# Altium PCB PreCharge.PcbDoc (part 1 of 2)
Units mil, origin at the board's own origin, x right, y up, seen from the top; angles counter-clockwise.
Board outline 4330.71 x 3149.61 mil, 2 copper layers (Component Side, Bottom Layer), stack 12.8 mil thick; 87 components, 44 nets, 242 pads, 58 vias.
Unrouted connection lines stored in the file: 38.
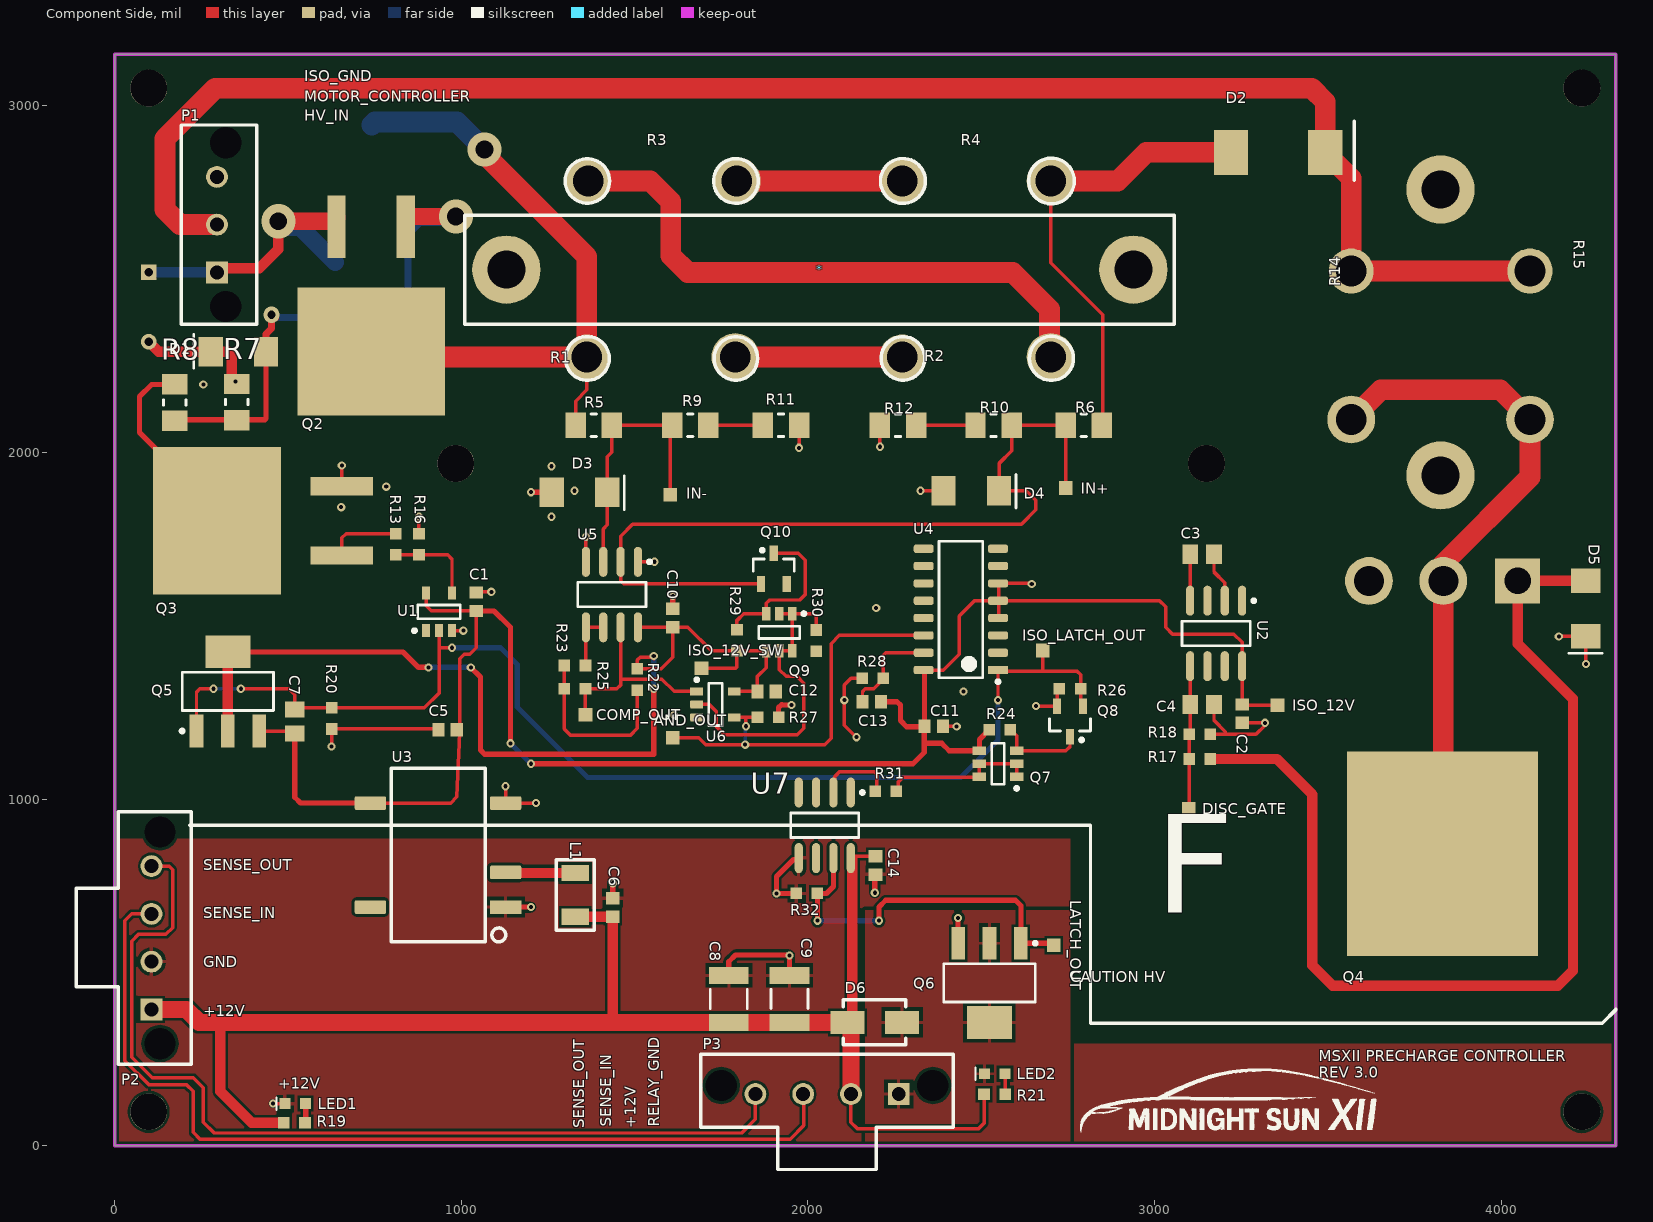
[diagram p0: Component Side view]
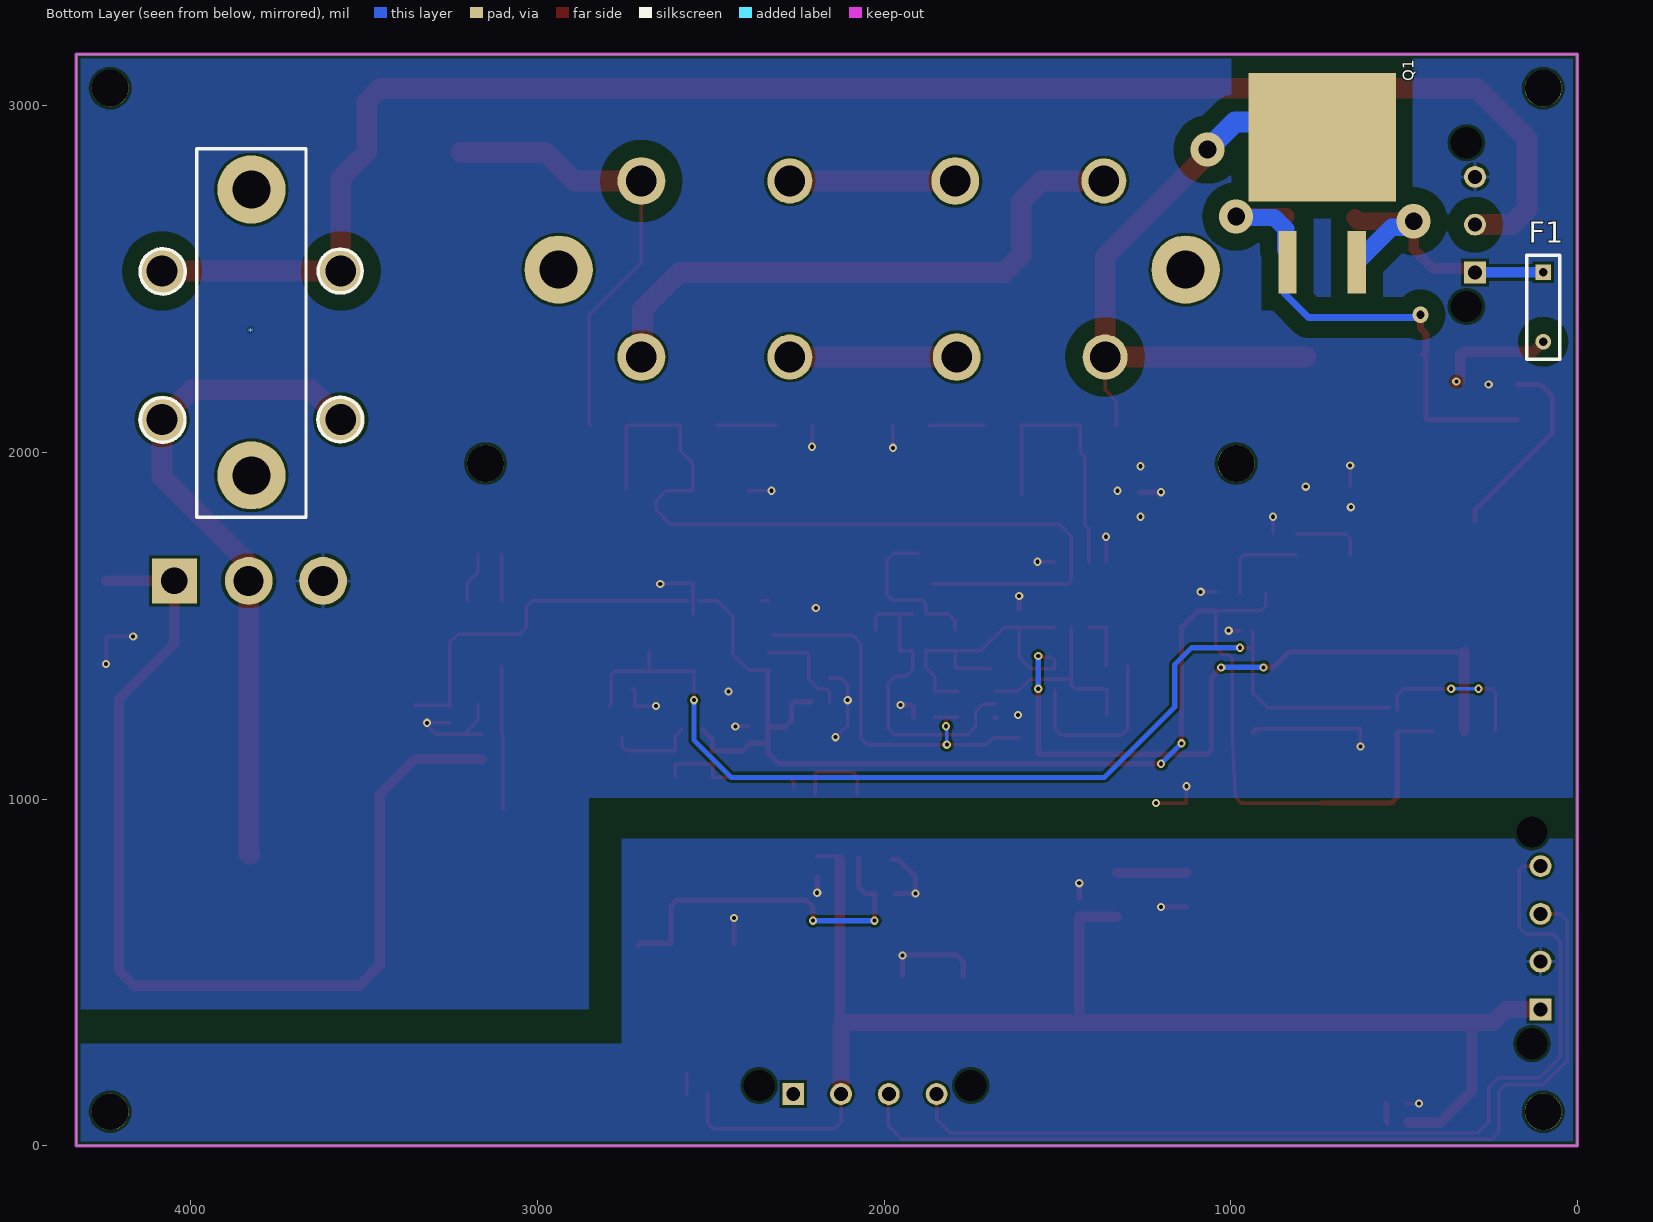
[diagram p1: Bottom Layer view, seen from below]
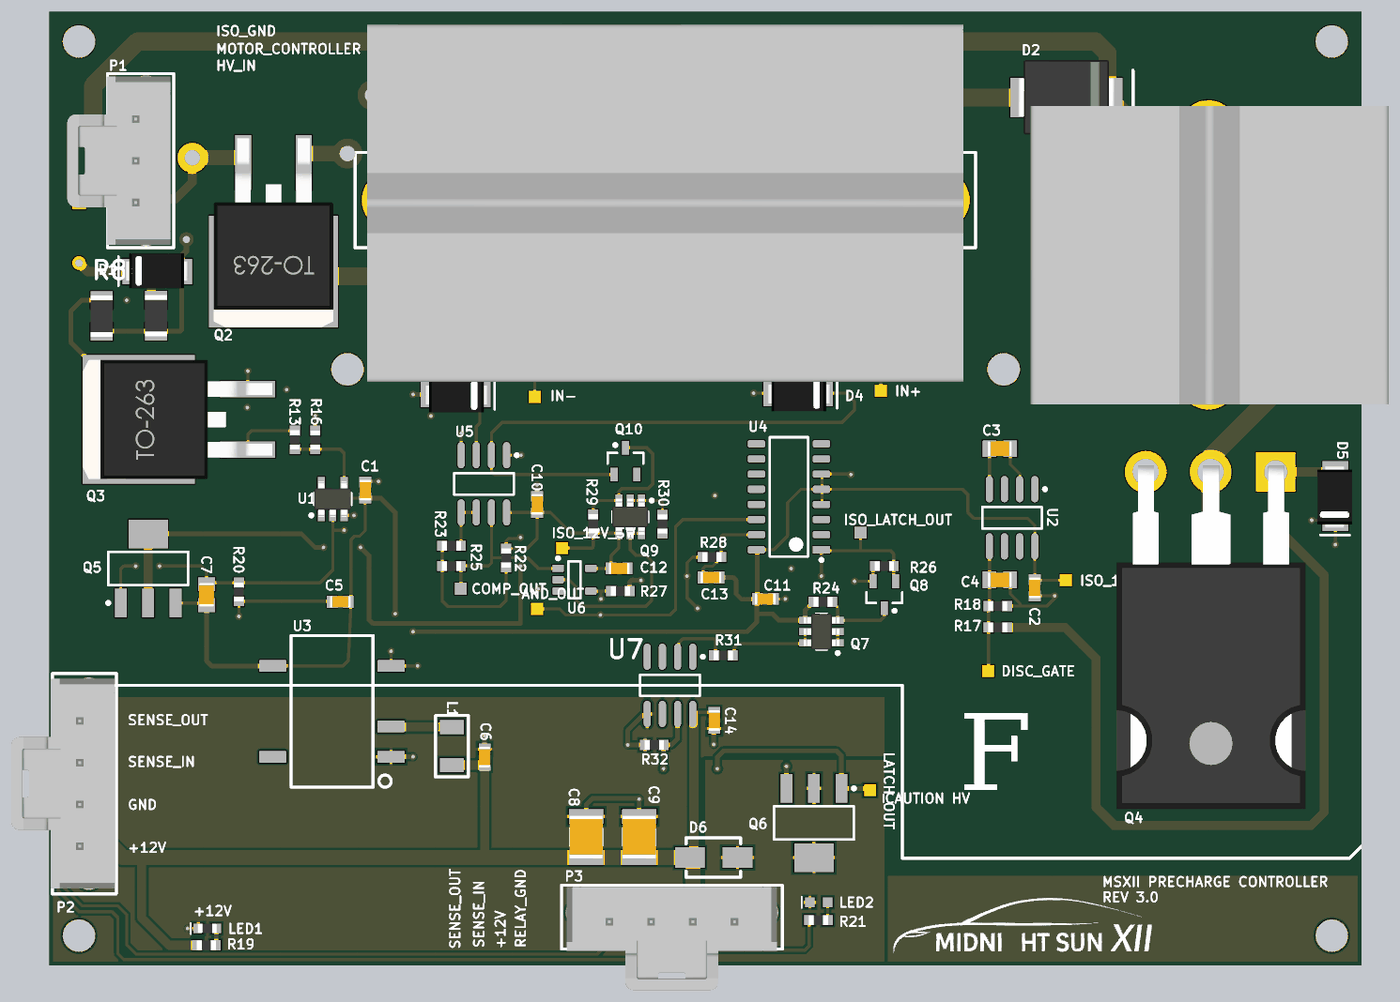
[diagram p2: 3D render of the assembled board from above, using the file's embedded part models]

## Layer stack, top to bottom
Top Solder: solder mask 0.4, Solder Resist, Dk 3.5
Component Side: signal copper 1.4
Dielectric 1: core 10, FR-4, Dk 4.2
Bottom Layer: signal copper 1.4
Solder Side: solder mask 0.4, Solder Resist, Dk 3.5

## Board outline
0,0 4330.71,0 4330.71,3149.61 0,3149.61

## Design rules (kind name [scope] priority, off if disabled: settings)
Clearance "Schematic Clearance Constraint_6" [InNet('NetQ4_2')] p1: gap=10 ignorepadtopadclearanceinfootprint=TRUE except(0: Arc-Hole Track-Hole SMDPad-Hole THPad-Hole Via-Hole Fill-Hole Poly-Hole Region-Hole Text-Hole)
Clearance "Schematic Clearance Constraint_5" [InNet('NetQ3_4')] p2: gap=10 ignorepadtopadclearanceinfootprint=TRUE except(0: Arc-Hole Track-Hole SMDPad-Hole THPad-Hole Via-Hole Fill-Hole Poly-Hole Region-Hole Text-Hole)
Clearance "Schematic Clearance Constraint_4" [InNet('NetD2_1')] p3: gap=49.21 ignorepadtopadclearanceinfootprint=TRUE
Clearance "Schematic Clearance Constraint_3" [InNet('NetD1_1')] p4: gap=49.21 ignorepadtopadclearanceinfootprint=TRUE
Clearance "Schematic Clearance Constraint_2" [InNet('NetD2_2')] p5: gap=49.21 ignorepadtopadclearanceinfootprint=TRUE
Clearance "Schematic Clearance Constraint" [InNet('NetQ1_4')] p6: gap=49.21 ignorepadtopadclearanceinfootprint=TRUE
Clearance "Schematic Clearance Constraint_1" [InNet('NetD1_2')] p7: gap=49.21 ignorepadtopadclearanceinfootprint=TRUE
Clearance Clearance_1 [InPolygon and InNet('ISO_GND') vs InNet('TO DISCHARGE RESISTOR') or InNet('PRECHARGEIN')or InNet('PRECHARGEOUT') or InNet('BAT_IN') or InNet('NetR12_1') or InNet('NetR13_1') or InComponent('K2')] p8: gap=31.5 ignorepadtopadclearanceinfootprint=FALSE except(0: Arc-Hole Track-Hole SMDPad-Hole THPad-Hole Via-Hole Fill-Hole Poly-Hole Region-Hole Text-Hole)
Clearance [All] p9: gap=7.87 ignorepadtopadclearanceinfootprint=FALSE except(0: Arc-Hole Track-Hole SMDPad-Hole THPad-Hole Via-Hole Fill-Hole Poly-Hole Region-Hole Text-Hole; 11.81: Poly-Poly Poly-Region Poly-Text)
Height [All] p1: minheight=0 maxheight=3937.01 prefheight=500
MinimumSolderMaskSliver [All] p1: minsoldermaskwidth=11.81
PolygonConnect Via_1 [IsVia] p1: connectstyle=Direct reliefconductorwidth=10 reliefentries=4 polygonreliefangle="90 Angle" airgapwidth=10
PolygonConnect [All] p2: connectstyle=Relief reliefconductorwidth=10 reliefentries=4 polygonreliefangle="90 Angle" airgapwidth=10
RoutingVias [All] p1: holewidth=11.81 width=23.62 viastyle="Through Hole" minholewidth=11.81 minwidth=23.62 maxholewidth=39.37 maxwidth=78.74
SolderMaskExpansion [All] p1: expansion=4
Width [All] p1: maxlimit=100 minlimit=7.87 preferedwidth=13.78
28 further rules are at their usual default settings.

## Classes and differential pairs
net class HV: NetD1_1 NetD1_2 NetD2_1 NetD2_2 NetQ1_4 NetQ3_4 NetQ4_2
component class Logic: AND_OUT C10 C11 C12 C13 C14 COMP_OUT IN+ IN- ISO_LATCH_OUT LATCH_OUT Q7 Q8 Q9 Q10 R22 R23 R24 R25 R26 R27 R28 R29 R30 R31 R32 U4 U5 U6 U7
component class "High Voltage Section": * C1 C2 C3 C4 D1 D2 D3 D4 D5 DISC_GATE F1 P1 Q1 Q2 Q3 Q4 R1 R2 R3 R4 R5 R6 R7 R8 R9 R10 R11 R12 R13 R14 R15 R16 R17 R18 R? U1 U2
component class PreCharge: C5 C6 C7 C8 C9 D6 ISO_12V ISO_12V_SW L1 LED1 LED2 P2 P3 Q5 Q6 R19 R20 R21 U3

## Components (designator, comment, footprint, x,y, rotation, side; value= is the part's Value field where it differs from the comment)
* "HEATSINK 4xTO-247" "HEATSINK 4X TO-247" 2702.36,2783.46 r180 top locked
* "HEATSINK 2xTO-247_1" "HEATSINK 2X TO-247" 3824.8,2758.66 r270 bottom
AND_OUT "Test Point" "Test Point" 1610.24,1177.17 r90 top
C1 "CAP CER 0.1UF 50V 10% X7R 0603" "CAP, 0603" 1043.31,1569.88 r90 top
C2 "CAP CER 2.2UF 25V 10% X5R 0603" "CAP, 0603" 3252.36,1247.05 r90 top
C3 "CAP CER 10uF 25V 10% X5R 0805" "CAP, 0805" 3136.81,1706.69 r180 top
C4 "CAP CER 10uF 25V 10% X5R 0805" "CAP, 0805" 3136.81,1273.62 r0 top
C5 "CAP CER 2.2UF 25V 10% X5R 0603" "CAP, 0603" 960.63,1200.79 r0 top
C6 "CAP CER 4.7UF 25V 10% X5R 0603" "CAP, 0603" 1437.01,687.99 r270 top
C7 "CAP CER 10uF 25V 10% X5R 0805" "CAP, 0805" 519.68,1224.41 r90 top
C8 "CAP CER 22UF 16V ±20% X5R 1210" "CAP, 1210" 1771.65,424.21 r90 top
C9 "CAP CER 22UF 16V ±20% X5R 1210" "CAP, 1210" 1946.85,424.21 r90 top
C10 "CAP CER 0.1UF 50V 10% X7R 0603" "CAP, 0603" 1610.24,1522.64 r270 top
C11 "CAP CER 0.1UF 50V 10% X7R 0603" "CAP, 0603" 2363.03,1210.32 r180 top
C12 "CAP CER 0.1UF 50V 10% X7R 0603" "CAP, 0603" 1880.91,1311.02 r180 top
C13 "CAP CER 1UF 50V 10% X7R 0603" "CAP, 0603" 2183.89,1281.19 r0 top
C14 "CAP CER 0.1UF 50V 10% X7R 0603" "CAP, 0603" 2194.88,809.06 r270 top
COMP_OUT "Test Point" "TEST POINT" 1358.27,1244.09 r90 top
D1 "DIODE ZENER 16V 5W DO-214AA (SMB)" "DO-214AA DIODE" 437.01,2291.34 r180 top
D2 "DIODE GEN PURP 800V 8A SMC" "DIODE, SMC" 3356.3,2866.14 r180 top
D3 "DIODE ZENER 16V 5W DO-214AA (SMB)" "DO-214AA DIODE" 1261.26,1885.83 r0 top
D4 "DIODE ZENER 16V 5W DO-214AA (SMB)" "DO-214AA DIODE" 2391.18,1889.76 r0 top
D5 "DIODE ZENER 16V 5W DO-214AA (SMB)" "DO-214AA DIODE" 4244.09,1629.92 r270 top
D6 "DIODE SCHOTTKY 60V 3A SMA" SMA 2271.65,356.3 r180 top
DISC_GATE "Test Point" "Test Point" 3098.43,972.44 r90 top
F1 "*" "FUSE 5A 400VDC RADIAL" 98.43,2519.68 r270 bottom
IN+ "Test Point" "Test Point" 2744.09,1897.64 r90 top
IN- "Test Point" "Test Point" 1602.36,1877.95 r90 top
ISO_12V "Test Point" "Test Point" 3354.33,1271.65 r90 top
ISO_12V_SW "Test Point" "Test Point" 1692.91,1377.95 r90 top
ISO_LATCH_OUT "Test Point" "TEST POINT" 2677.17,1429.13 r90 top
L1 "IND 6.8uH 260mA 20% 1210" "NLFV32T-6R8M-EF/IND 6.8UH" 1328.74,661.42 r90 top
LATCH_OUT "Test Point" "Test Point" 2708.66,578.74 r90 top
LED1 "LED GREEN CLEAR 2V 0603" LED_0603 549.21,122.44 r180 top
LED2 "LED YELLOW CLEAR 2.1V 0603" LED_0603 2566.93,208.66 r180 top
P1 "CONN 3POS ULTRA-FIT 0.138\"" "CONN, 3POS ULTRA-FIT" 295.28,2519.68 r90 top
P2 "CONN 4POS ULTRA-FIT 0.138\"" "CONN, 4POS ULTRA-FIT" 106.3,393.7 r90 top
P3 "CONN 4POS ULTRA-FIT 0.138\"" "CONN, 4POS ULTRA-FIT" 2261.81,149.61 r180 top
Q1 "IXTA10P50P" "P-CH MOSFET 500V 10A 300W TO-263" 736.22,2909.45 r180 bottom
Q2 "IXTA10P50P" "P-CH MOSFET 500V 10A 300W TO-263" 740.16,2291.34 r180 top
Q3 "MOSFET N-CH 650V 8A X2 TO-263" "P-CH MOSFET 500V 10A 300W TO-263" 295.28,1803.15 r90 top
Q4 "MOSFET DEPLETION N-CH 500V 6A TO247" "N-CH Depletion Mode TO-247-3" 4047.24,1629.92 r180 top
Q5 "P-Channel" SOT223_N 326.77,1311.02 r90 top
Q6 "N-Channel" SOT223_N 2523.62,470.47 r270 top
Q7 "MOSFET P-CH 30V 4A 1.6W SOT-23-6" P-MOSFET 2548.23,1102.36 r180 top
Q8 "MOSFET N-CH 60V 310MA SOT23" SOT23 2755.91,1224.41 r270 top
Q9 "MOSFET P-CH 30V 4A 1.6W SOT-23-6" P-MOSFET 1917.32,1481.69 r270 top
Q10 "MOSFET N-CH 60V 310MA SOT23" SOT23 1901.57,1665.35 r90 top
R1 "RES 18 OHM 100W 5% TO-247" "RES TO-247-2" 1362.2,2275.59 r0 top
R2 "RES 18 OHM 100W 5% TO-247" "RES TO-247-2" 2271.65,2275.59 r0 top
R3 "RES 18 OHM 100W 5% TO-247" "RES TO-247-2" 1366.14,2783.46 r0 top
R4 "RES 18 OHM 100W 5% TO-247" "RES TO-247-2" 2271.65,2783.46 r0 top
R5 "RESISTOR" "RES 1206" 1381.89,2078.74 r0 top
R6 "RESISTOR" "RES 1206" 2795.28,2078.74 r180 top
R7 "Resistor" "RES 1206" 352.62,2145.67 r270 top
R8 "RESISTOR" "RES 1206" 173.23,2144.62 r90 top
R9 "Resistor" "RES 1206" 1660.43,2078.74 r0 top
R10 "Resistor" "RES 1206" 2535.43,2078.74 r180 top
R11 "RES SMD 2K OHM 0.1% 1/4W 1206" "RES 1206" 1922.24,2078.74 r0 top
R12 "RES SMD 0 OHM JUMPER 1/4W 1206" "RES 1206" 2259.84,2078.74 r180 top
R13 "RES 22.1 OHM 1% 1/10W 0603" "RES, 0603" 811.02,1735.63 r270 top
R14 "RES 330 OHM 100W 5% TO-247" "RES TO-247-2" 3566.93,2523.62 r270 top
R15 "RES 330 OHM 100W 5% TO-247" "RES TO-247-2" 4082.68,2523.62 r270 top
R16 "RES 10K OHM 1% 1/10W 0603" "RES, 0603" 877.95,1735.24 r90 top
R17 "RES 40.2 OHM 0.5% 1/10W 0603" "RES, 0603" 3129.92,1116.14 r0 top
R18 "RES 10K OHM 1% 1/10W 0603" "RES, 0603" 3129.92,1187.01 r0 top
R19 "RES 10K OHM 1% 1/10W 0603" "RES, 0603" 518.7,66.93 r180 top
R20 "RES 10K OHM 1% 1/10W 0603" "RES, 0603" 625.98,1233.27 r270 top
R21 "RES 10K OHM 1% 1/10W 0603" "RES, 0603" 2538.39,149.61 r0 top
R22 "RES 100 OHM 1% 1/10W 0603" "RES, 0603" 1507.87,1345.47 r270 top
R23 "RES 33K OHM 1% 1/4W 0603" "RES, 0603" 1327.76,1385.83 r180 top
R24 "RES 10K OHM 1% 1/10W 0603" "RES, 0603" 2553.31,1200.79 r0 top
R25 "RES 6.8k OHM 1% 1/10W 0603" "RES, 0603" 1327.76,1318.9 r0 top
R26 "RES 10K OHM 1% 1/10W 0603" "RES, 0603" 2755.91,1318.9 r0 top
R27 "RES 10K OHM 1% 1/10W 0603" "RES, 0603" 1884.84,1236.22 r180 top
R28 "RES 10K OHM 1% 1/10W 0603" "RES, 0603" 2186.91,1348.85 r0 top
R29 "RES 10K OHM 1% 1/10W 0603" "RES, 0603" 1795.28,1458.46 r90 top
R30 "RES 10K OHM 1% 1/10W 0603" "RES, 0603" 2023.62,1457.68 r270 top
R31 "1K" "RES, 0603" 2224.6,1023.62 r180 top
R32 "RES 10K OHM 1% 1/10W 0603" "RES, 0603" 1996.85,728.35 r180 top
U1 "Inverter" "SSOP5 - Inverter" 935.83,1540.35 r90 top
U2 "IC REG SWTCHD CAP INV 20MA 8SOIC" SOIC8 3176.18,1478.58 r270 top
U3 "IC DCDC ISOLATED 12V 1W 8-SMD 5-LEAD" "IC, Isolated DCDC" 1082.68,688.98 r90 top
U4 "IC SR LATCH 4CH 16SOIC" "IC, SR Latch, CD4043BDR" 2440.94,1547.63 r180 top
U5 "IC COMPARATOR 8-SOIC" SOIC8 1433.27,1590.79 r270 top
U6 "IC AND GATE 1CH 5-SSOP" "IC, 2-Input AND Gate" 1733.27,1273.62 r0 top
U7 "OPTOISO 3.75KV PUSH PULL 8SO" SOIC8 2047.24,925.2 r270 top

## Footprints (in the part's own frame and the unit in brackets; to place one, negate y for a bottom-side part, rotate by r counter-clockwise, add the part's x,y. Pads: shape width x height; smd on the part's side, far side on the other; paste and mask are expansions set on the pad)
"CAP, 0603" [mm] "Chip Capacitor, 2-Leads, Body 1.60x0.81mm, IPC Medium Density"
  rect 0.9x1 smd mask+0.076: 1(-0.675,0) 2(0.675,0)
  body extent -0.87,-0.48 0.87,0.48, height 0.9
"CAP, 0805" [mm] "Chip Capacitor, 2-Leads, Body 2.00x1.25mm, IPC Medium Density"
  rect 1.15x1.4 smd: 1(-0.875,0) 2(0.875,0)
  body extent -1,-0.62 1,0.63, height 1.25
"CAP, 1210" [mm] "Chip Capacitor, 2-Leads, Body 3.20x2.50mm, IPC Low Density"
  rect 1.25x2.9 smd: 1(-1.725,0) 2(1.725,0)
  silkscreen extent -0.7,-1.35 0.7,1.35, body extent -1.8,-1.4 1.8,1.4, height 2.8
"CONN, 3POS ULTRA-FIT" [mm]
  rect 1.6x1.6 hole 1.02: 1(0,0)
  round 1.6 hole 1.02: 2(3.5,0) 3(7,0)
  round 0 hole 2.3: ""(-2.5,-0.63) ""(9.5,-0.63)
  silkscreen extent -3.8,-2.93 10.8,2.62, body extent -3.55,-2.67 10.55,5.99, height 13.85
"CONN, 4POS ULTRA-FIT" [mm]
  rect 1.6x1.6 hole 1.02: 1(0,0)
  round 1.6 hole 1.02: 2(3.5,0) 3(7,0) 4(10.5,0)
  round 0 hole 2.3: ""(-2.5,-0.63) ""(13,-0.63)
  silkscreen extent -4,-2.93 14.5,5.53, body extent -3.54,-2.78 14.06,5.88, height 13.85
"DIODE, SMC" [mm]
  rect 2.5x3.3 smd: 1(-3.45,0) 2(3.45,0)
  silkscreen extent -5.59,-2.29 -5.59,2.03, body extent -4.08,-3.15 4.08,3.1, height 2.65
"DO-214AA DIODE" [mil] "Zener Diode 16V 5W SMBJ5353B-TP"
  rect 70x85 smd: 1(0,0) 2(160,0)
  silkscreen extent 209,-50 209,47, body extent -21,-60 187,55, height 95
"FUSE 5A 400VDC RADIAL" [mil]
  rect 45x45 hole 25: 1(0,0)
  round 45 hole 25: 2(200,0)
  silkscreen extent -50,-48 250,48, body extent -55,-53 255,53, height 320
"HEATSINK 2X TO-247" [mm]
  round 5 hole 2.775: 6(0,0) 7(20.94,0)
  silkscreen extent -3,-8.16 24,8.13, body extent -2,-15.1 23,14.9, height 59.7
"HEATSINK 4X TO-247" [mm]
  round 5 hole 2.775: 6(-6,6.5) 7(39.94,6.5)
  silkscreen extent -9,-1.68 43,14.61, body extent -8,-8.25 42,21.75, height 59.7
"IC, 2-Input AND Gate" [mm] "IC GATE AND 1CH 2-INP 5-SSOP"
  rect 0.95x0.6 smd: 1(-1.375,0.95)
  rrect25% 0.95x0.6 smd: 2(-1.375,0) 3(-1.375,-0.95) 4(1.375,-0.95) 5(1.375,0.95)
  silkscreen extent -1.5,-1.55 0.5,1.92, body extent -0.9,-1.55 0.9,1.55, height 1.25
"IC, Isolated DCDC" [mm]
  rect 1x2.29 smd: 1(0,-1.15)
  rrect20% 1x2.29 smd: 2(2.54,-1.15) 4(7.62,-1.15) 5(7.62,8.76) 8(0,8.76)
  silkscreen extent -2.55,-1.16 10.16,7.22, body extent -2.54,0.35 10.16,7.22, height 7
"IC, SR Latch, CD4043BDR" [mm] "SR LATCH"
  rect 1.45x0.6 smd: 1(-2.725,4.445)
  rrect50% 1.45x0.6 smd: 2(-2.725,3.175) 3(-2.725,1.905) 4(-2.725,0.635) 5(-2.725,-0.635) 6(-2.725,-1.905) 7(-2.725,-3.175) 8(-2.725,-4.445) 9(2.725,-4.445) 10(2.725,-3.175) 11(2.725,-1.905) 12(2.725,-0.635) 13(2.725,0.635) 14(2.725,1.905) 15(2.725,3.175) 16(2.725,4.445)
  silkscreen extent -2.85,-5 1.6,5.42, body extent -2,-5 2,5, height 1.75
LED_0603 [mm]
  rect 0.8x0.8 smd: 1(-0.05,0.01) 2(1.45,0.01)
  silkscreen extent 2.09,-0.43 2.09,0.48, body extent -0.1,-0.39 1.5,0.41, height 0.55
"N-CH Depletion Mode TO-247-3" [mm]
  rect 3.3x3.3 hole 1.95: 1(0,0)
  round 3.5 hole 2.2: 2(5.45,0) 3(10.9,0)
  rect 14x15 smd: 2(5.5,20)
  body extent -2.5,-0.5 13.35,28.28, height 5.3
"NLFV32T-6R8M-EF/IND 6.8UH" [mm]
  rect 1.2x2 smd: 1(0,0) 2(3.2,0)
  silkscreen extent -0.98,-1.38 4.17,1.38, body extent -0.98,-1.38 4.17,1.38, height 2.2
"P-CH MOSFET 500V 10A 300W TO-263" [mm]
  rect 1.35x4.6 smd: 1(-2.54,-9.15) 3(2.54,-9.15)
  rect 10.8x9.4 smd: 4(0,0)
  body extent -5,-11.19 5,4.69, height 4.3
P-MOSFET [mm] "SOT23, 6-Leads, Body 2.93x2.80mm, Pitch 0.95mm, IPC Medium Density"
  rect 1x0.6 smd mask+0.076: 1(-1.365,0.95) 2(-1.365,0) 3(-1.365,-0.95) 4(1.365,-0.95) 5(1.365,0) 6(1.365,0.95)
  silkscreen extent -1.49,-1.5 0.45,1.92, body extent -1.5,-1.52 1.5,1.52, height 1.25
"RES 1206" [mm] "Chip Resistor, 2-Leads, Body 3.20x1.60mm, IPC Medium Density"
  rect 1.5x1.85 smd: 1(-1.325,0) 2(1.325,0)
  silkscreen extent -0.2,-0.82 0.2,0.82, body extent -1.73,-0.92 1.73,0.92, height 0.64
"RES TO-247-2" [mm]
  round 3.3 hole 2.25: 1(0,0)
  round 3.5 hole 2.25: 2(10.88,0)
  body extent -2.37,-2.75 13.13,2.25, height 25.5
"RES, 0603" [mm] "Chip Resistor, 2-Leads, Body 1.60x0.80mm, IPC Medium Density"
  rect 0.85x0.85 smd: 1(-0.775,0) 2(0.775,0)
  body extent -0.8,-0.4 0.8,0.4, height 0.55
SMA [mm]
  rect 2.5x1.7 smd: 1(0,0) 2(4,0)
  silkscreen extent -0.25,-1.65 4.32,1.65
SOIC8 [mm]
  oval 2.2x0.6 smd: 1(-2.394,1.935) 2(-2.394,0.665) 3(-2.394,-0.605) 4(-2.394,-1.875) 5(2.406,-1.875) 6(2.406,-0.605) 7(2.406,0.665) 8(2.406,1.935)
  silkscreen extent -2.52,-2.47 0.91,2.91, body extent -1.99,-2.47 2.01,2.53, height 1.75
SOT23 [mm] "SOT23, 3-Leads, Body 2.9x1.3mm, Pitch 0.95mm, Lead Span 2.3mm - Reverse Pinning, IPC Medium Density"
  rect 1.15x0.6 smd: 1(1.125,0) 2(-1.125,-0.95) 3(-1.125,0.95)
  silkscreen extent -0.2,-1.5 1.47,1.5, body extent -0.7,-1.5 0.7,1.5, height 1.1
SOT223_N [mm] "SOT223, 4-Leads, Body 6.5x3.5mm, Pitch 2.3mm, Lead Span 7mm, IPC Medium Density"
  rect 2.4x1 smd: 1(-2.9,2.3) 2(-2.9,0) 3(-2.9,-2.3)
  rect 2.4x3.3 smd: 4(2.9,0)
  silkscreen extent -3.02,-3.35 1.4,3.47, body extent -1.85,-3.35 1.85,3.35, height 1.7
"SSOP5 - Inverter" [mm] "SSOP5, 5-Leads, Body 2.90x2.80mm, Pitch 0.95mm, IPC Medium Density"
  rect 0.95x0.6 smd: 1(-1.375,0.95) 2(-1.375,0) 3(-1.375,-0.95) 4(1.375,-0.95) 5(1.375,0.95)
  silkscreen extent -1.5,-1.55 0.5,1.92, body extent -1.5,-1.55 1.5,1.55, height 1.2
"Test Point" [mm]
  rect 1x1 smd paste-2: TP(0,0)
"TEST POINT" [mm]
  rect 1x1 smd: TP(0,0)

## Part data
*: "n Heat Sink TO-220, TO-247, TO-264 Aluminum Board Level, Vertical", Manufacturer=Wakefield, Manufacturer Part Number=OMNI-UNI-30-50-D, Supplier Part Number 1=345-1574-ND, Pricing 1="1=4.09, 10=3.98, 25=3.8724, 50=3.6572, 100=3.4421, 250=3.22696, 500=3.11938, 1000=2.79669 (USD)", Stock 1=465, Supplier 1=Digi-Key
*: "Heat Sink TO-220, TO-247, TO-264 Aluminum Board Level, Vertical", Manufacturer=Wakefield, Manufacturer Part Number=OMNI-UNI-30-50-D, Supplier Part Number 1=345-1573-ND, Pricing 1="1=2.8, 10=2.728, 25=2.6544, 50=2.5068, 100=2.3594, 250=2.21192, 500=2.13818, 1000=1.91698, 5000=1.88012 (USD)", Stock 1=499, Supplier 1=Digi-Key
C1 C10 C11 C12 C14: "0.10µF ±10% 50V Ceramic Capacitor X7R 0603 (1608 Metric)", Capacitance=0.1µF, Manufacturer 1="AVX Corporation", Manufacturer Part Number 1=06035C104KAT2A, Operating Temperature="-55°C ~ 125°C", Package / Case="0603 (1608 Metric)", Ratings=-, Supplier Part Number 1=478-5052-1-ND, Temperature Coefficient=X7R, Tolerance=±10%, Voltage=50V, ComponentLink1Description=http://datasheets.avx.com/X7RDielectric.pdf, ComponentLink1URL=http://datasheets.avx.com/X7RDielectric.pdf, Height - Seated (Max)=-, Lead Spacing=-, Lead Style=-, Mounting Type="Surface Mount, MLCC", Packaging="Cut Tape (CT)", Part Status=Active, Size / Dimension="0.063\" L x 0.032\" W (1.60mm x 0.81mm)", Supplier 1=Digi-Key, Thickness (Max)="0.035\" (0.90mm)"
C2 C5: "2.2µF ±10% 25V Ceramic Capacitor X5R 0603 (1608 Metric)", Capacitance=2.2µF, Manufacturer 1="Murata Electronics North America", Manufacturer Part Number 1=GRM188R61E225KA12D, Operating Temperature="-55°C ~ 85°C", Package / Case="0603 (1608 Metric)", Ratings=-, Supplier Part Number 1=490-10731-1-ND, Temperature Coefficient=X5R, Tolerance=±10%, Voltage=25V, ComponentLink1Description=http://www.murata.com/~/media/webrenewal/support/library/catalog/products/capacitor/mlcc/c02e.ashx, ComponentLink1URL=http://www.murata.com/~/media/webrenewal/support/library/catalog/products/capacitor/mlcc/c02e.ashx, Height - Seated (Max)=-, Lead Spacing=-, Lead Style=-, Mounting Type="Surface Mount, MLCC", Packaging="Cut Tape (CT)", Part Status=Active, Size / Dimension="0.063\" L x 0.031\" W (1.60mm x 0.80mm)", Supplier 1=Digi-Key, Thickness (Max)="0.035\" (0.90mm)"
C3 C4 C7: "10µF ±10% 25V Ceramic Capacitor X5R 0805 (2012 Metric)", Capacitance=10µF, Manufacturer="Murata Electronics North America", Manufacturer Part Number=GRM21BR61E106KA73L, Operating Temperature="-55°C ~ 85°C", Package / Case="0805 (2012 Metric)", Ratings=-, Supplier Part Number 1=490-5523-1-ND, Temperature Coefficient=X5R, Tolerance=±10%, Voltage - Rated=25V, Applications="General Purpose", Category=Capacitors, ComponentLink1Description=http://search.murata.co.jp/Ceramy/image/img/A01X/G101/ENG/GRM21BR61E106KA73-01.pdf, ComponentLink1URL=http://search.murata.co.jp/Ceramy/image/img/A01X/G101/ENG/GRM21BR61E106KA73-01.pdf, Features=-, Height - Seated (Max)=-, Lead Spacing=-, Lead Style=-, Mounting Type="Surface Mount, MLCC", Packaging="Cut Tape (CT)", Part Status=Active, Pricing 1="1=0.3, 10=0.214, 100=0.1008, 500=0.07068, 1000=0.05851 (CAD)", RoHS="RoHS Compliant", Size / Dimension="0.079\" L x 0.049\" W (2.00mm x 1.25mm)", Stock 1=1695157, Supplier 1=Digi-Key, Thickness (Max)="0.053\" (1.35mm)"
C6: "4.7µF ±10% 25V Ceramic Capacitor X5R 0603 (1608 Metric)", Capacitance=4.7µF, Manufacturer 1="Murata Electronics North America", Manufacturer Part Number 1=GRM188R61E475KE11D, Operating Temperature="-55°C ~ 85°C", Package / Case="0603 (1608 Metric)", Ratings=-, Supplier Part Number 1=490-7203-1-ND, Temperature Coefficient=X5R, Tolerance=±10%, Voltage=25V, ComponentLink1Description=http://www.murata.com/~/media/webrenewal/support/library/catalog/products/capacitor/mlcc/c02e.ashx, ComponentLink1URL=http://www.murata.com/~/media/webrenewal/support/library/catalog/products/capacitor/mlcc/c02e.ashx, Height - Seated (Max)=-, Lead Spacing=-, Lead Style=-, Mounting Type="Surface Mount, MLCC", Packaging="Cut Tape (CT)", Part Status=Active, Size / Dimension="0.063\" L x 0.031\" W (1.60mm x 0.80mm)", Supplier 1=Digi-Key, Thickness (Max)="0.031\" (0.80mm)"
C8 C9: "22µF ±20% 16V Ceramic Capacitor X5R 1210 (3225 Metric)", Capacitance=22µF, Manufacturer 1="Murata Electronics North America", Manufacturer Part Number 1=GRM32ER61C226ME20L, Operating Temperature="-55°C ~ 85°C", Package / Case="1210 (3225 Metric)", Ratings=-, Supplier Part Number 1=490-1881-1-ND, Temperature Coefficient=X5R, Tolerance=±20%, Voltage=16V, ComponentLink1Description=http://www.murata.com/~/media/webrenewal/support/library/catalog/products/capacitor/mlcc/c02e.ashx, ComponentLink1URL=http://www.murata.com/~/media/webrenewal/support/library/catalog/products/capacitor/mlcc/c02e.ashx, Height - Seated (Max)=-, Lead Spacing=-, Lead Style=-, Mounting Type="Surface Mount, MLCC", Packaging="Cut Tape (CT)", Part Status=Active, Size / Dimension="0.126\" L x 0.098\" W (3.20mm x 2.50mm)", Supplier 1=Digi-Key, Thickness (Max)="0.106\" (2.70mm)"
C13: "1µF ±10% 50V Ceramic Capacitor X7R 0603 (1608 Metric)", Capacitance=1µF, Manufacturer 1="Taiyo Yuden", Manufacturer Part Number 1=UMK107AB7105KA-T, Operating Temperature="-55°C ~ 125°C", Package / Case="0603 (1608 Metric)", Ratings=-, Supplier Part Number 1=587-3247-1-ND, Temperature Coefficient=X7R, Tolerance=±10%, Voltage=50V, ComponentLink1Description=http://www.yuden.co.jp/productdata/catalog/en/mlcc_all_e.pdf, ComponentLink1URL=http://www.yuden.co.jp/productdata/catalog/en/mlcc_all_e.pdf, Height - Seated (Max)=-, Lead Spacing=-, Lead Style=-, Mounting Type="Surface Mount, MLCC", Packaging="Cut Tape (CT)", Part Status=Active, Size / Dimension="0.063\" L x 0.031\" W (1.60mm x 0.80mm)", Supplier 1=Digi-Key, Thickness (Max)="0.037\" (0.95mm)"
D1 D3 D4 D5: "Zener Diode 16V 5W ±5% Surface Mount DO-214AA (SMB)", Manufacture="Micro Commercial Co", Manufacture Part Number=SMBJ5353B-TP, Power (Max)=5W, Supplier Part Number 1=SMBJ5353B-TPMSCT-ND, Voltage - Forward="1.2V @ 1A", Voltage - Zener (Nom)=16V, Impedence (Max)="2.5 Ohm", Supplier 1=Digi-Key
D2: Average Rectified Current=8A, Case/Package=SMC, Forward Voltage=985mV, Manufacturer=Diodes, Manufacturer Part Number=S8KC-13, Max Forward Surge Current (Ifsm)=200A, Max Operating Temperature=150°C, Max Repetitive Reverse Voltage (Vrrm)=800V, Min Operating Temperature=-65°C, Package Quantity=3000, Peak Reverse Current=10uA, Supplier Part Number 1=S8KCDICT-ND, ComponentLink1Description=https://datasheet.ciiva.com/15144/getdatasheetpartid-61102-15144323.pdf, ComponentLink1URL=https://datasheet.ciiva.com/15144/getdatasheetpartid-61102-15144323.pdf, ComponentLink2Description=https://datasheet.ciiva.com/16388/ds31117-16388346.pdf, ComponentLink2URL=https://datasheet.ciiva.com/16388/ds31117-16388346.pdf, ComponentLink3Description=https://datasheet.ciiva.com/914/ds31117-914779.pdf, ComponentLink3URL=https://datasheet.ciiva.com/914/ds31117-914779.pdf, ComponentLink4Description=https://datasheet.ciiva.com/4453/ds31117-63855-4453947.pdf, ComponentLink4URL=https://datasheet.ciiva.com/4453/ds31117-63855-4453947.pdf, Contact Plating=Tin,Matte, Element Configuration=Single, Forward Current=8A, Height=2.42mm, Lead Free="Lead Free", Length=7.11mm, Max Reverse Voltage (DC)=800V, Max Surge Current=200A, Mount="Surface Mount", Number of Pins=2, Packaging="Tape and Reel", Peak Non-Repetitive Surge Current=200A, Pricing 1="1=0.68, 10=0.598, 100=0.4586, 500=0.36256, 1000=0.29005 (USD)", Radiation Hardening=No, Reverse Voltage (DC)=800V, Stock 1=38298, Supplier 1=Digi-Key, Weight=0.007408oz, Width=6.22mm
D6: "Diode Schottky 60V 3A Surface Mount SMA", Capacitance @ Vr, F="200pF @ 4V, 1MHz", Current - Average Rectified (Io)=3A, Current - Reverse Leakage @ Vr="500µA @ 60V", Manufacturer 1="Diodes Incorporated", Manufacturer Part Number 1=B360A-13-F, Operating Temperature - Junction="-55°C ~ 150°C", Package / Case="DO-214AC, SMA", Supplier Device Package=SMA, Supplier Part Number 1=B360A-FDICT-ND, Voltage - DC Reverse (Vr) (Max)=60V, Voltage - Forward (Vf) (Max) @ If="700mV @ 3A", ComponentLink1Description=https://www.diodes.com/assets/Datasheets/ds30891.pdf, ComponentLink1URL=https://www.diodes.com/assets/Datasheets/ds30891.pdf, Diode Type=Schottky, Mounting Type="Surface Mount", Packaging="Cut Tape (CT)", Part Status=Active, Speed="Fast Recovery =< 500ns, > 200mA (Io)", Supplier 1=Digi-Key
F1: library part "FUSE BOARD MNT 3A 250VAC/450VDC", "283-2761-ND", ComponentLink1Description=https://www.digikey.ca/product-detail/en/eaton-electronics-division/BK-PCB-3-R/283-2761-ND/954341, ComponentLink1URL=https://www.digikey.ca/product-detail/en/eaton-electronics-division/BK-PCB-3-R/283-2761-ND/954341, Supplier 1=Digi-Key, Supplier Part Number 1=283-2761-ND
L1: "6.8µH Shielded Wirewound Inductor 260mA 204 mOhm Max 1210 (3225 Metric)", Current - Saturation=-, Current Rating=260mA, DC Resistance (DCR)="204 mOhm Max", Inductance=6.8µH, Manufacturer 1="TDK Corporation", Manufacturer Part Number 1=NLFV32T-6R8M-EF, Operating Temperature="-40°C ~ 105°C", Package / Case="1210 (3225 Metric)", Supplier Part Number 1=445-15776-1-ND, Tolerance=±20%, ComponentLink1Description=https://product.tdk.com/info/en/catalog/datasheets/inductor_commercial_decoupling_nlfv32-ef_en.pdf, ComponentLink1URL=https://product.tdk.com/info/en/catalog/datasheets/inductor_commercial_decoupling_nlfv32-ef_en.pdf, Frequency - Self Resonant=-, Height - Seated (Max)="0.094\" (2.40mm)", Material - Core=Ferrite, Mounting Type="Surface Mount", Packaging="Cut Tape (CT)", Part Status=Active, Q @ Freq=-, Ratings=-, Shielding=Shielded, Size / Dimension="0.126\" L x 0.098\" W (3.20mm x 2.50mm)", Supplier 1=Digi-Key, Supplier Device Package="1210 (3225 Metric)", Type=Wirewound
LED1: "Green 572nm LED Indication - Discrete 2V 0603 (1608 Metric)", Color=Green, Current - Test=20mA, Lens Color=Colorless, Manufacturer="Wurth Electronics Inc.", Manufacturer Part Number=150060VS75000, Millicandela Rating=40mcd, Package / Case="0603 (1608 Metric)", Supplier Device Package=0603, Supplier Part Number 1=732-4980-1-ND, Voltage - Forward (Vf) (Typ)=2V, Category=Optoelectronics, ComponentLink1Description=http://katalog.we-online.de/led/datasheet/150060VS75000.pdf, ComponentLink1URL=http://katalog.we-online.de/led/datasheet/150060VS75000.pdf, Features=-, Height (Max)=0.80mm, Lens Style/Size="Rectangle with Flat Top, 1.10mm x 0.70mm", Lens Transparency=Clear, Mounting Type="Surface Mount", Packaging="Cut Tape (CT)", Part Status=Active, Pricing 1="1=0.21, 100=0.1617, 500=0.13964 (CAD)", RoHS="RoHS Compliant", Size / Dimension="1.60mm L x 0.80mm W", Stock 1=9408, Supplier 1=Digi-Key, Viewing Angle=140°, Wavelength - Dominant=570nm, Wavelength - Peak=572nm
LED2: "Yellow 590nm LED Indication - Discrete 2V 0603 (1608 Metric)", Color=Yellow, Current - Test=20mA, Lens Color=Colorless, Manufacturer="Wurth Electronics Inc.", Manufacturer Part Number=150060YS75000, Millicandela Rating=120mcd, Package / Case="0603 (1608 Metric)", Supplier Device Package=0603, Supplier Part Number 1=732-4981-1-ND, Voltage - Forward (Vf) (Typ)=2V, Category=Optoelectronics, ComponentLink1Description=http://katalog.we-online.de/led/datasheet/150060YS75000.pdf, ComponentLink1URL=http://katalog.we-online.de/led/datasheet/150060YS75000.pdf, Features=-, Height (Max)=0.80mm, Lens Style/Size="Rectangle with Flat Top, 1.10mm x 0.70mm", Lens Transparency=Clear, Mounting Type="Surface Mount", Packaging="Cut Tape (CT)", Part Status=Active, Pricing 1="1=0.21, 100=0.1617, 500=0.13964 (CAD)", RoHS="RoHS Compliant", Size / Dimension="1.60mm L x 0.80mm W", Stock 1=10523, Supplier 1=Digi-Key, Viewing Angle=140°, Wavelength - Dominant=590nm, Wavelength - Peak=595nm
P1: "3 Positions Header Connector 0.138\" (3.50mm) Through Hole Tin", Current Rating=-, Insulation Color=Black, Manufacturer 1="Molex, LLC", Manufacturer Part Number 1=1722871103, Material Flammability Rating="UL94 V-0", Operating Temperature="-40°C ~ 105°C", Supplier Part Number 1=WM11702-ND, Voltage=400V, ComponentLink1Description=http://www.molex.com/pdm_docs/sd/1722871103_sd.pdf, ComponentLink1URL=http://www.molex.com/pdm_docs/sd/1722871103_sd.pdf, Connector Type=Header, Contact Finish - Mating=Tin, Contact Finish - Post=Tin, Contact Finish Thickness - Mating="60µin (1.52µm)", Contact Finish Thickness - Post="60µin (1.52µm)", Contact Length - Mating=-, Contact Length - Post="0.126\" (3.20mm)", Contact Material="Copper Alloy", Contact Shape=Square, Contact Type="Male Pin", Fastening Type="Latch Holder", Ingress Protection=-, Insulation Height="0.465\" (11.80mm)", Insulation Material="Liquid Crystal Polymer (LCP)", Mated Stacking Heights=26.99mm, Mounting Type="Through Hole", Number of Positions=3, Number of Positions Loaded=All, Number of Rows=1, Overall Contact Length=-, Packaging=Tray, Part Status=Active, Pitch - Mating="0.138\" (3.50mm)", Row Spacing - Mating=-, Series=UltraFit, Shrouding="Shrouded - 4 Wall", Style="Board to Cable/Wire", Supplier 1=Digi-Key, Termination=Solder
P2 P3: "4 Positions Header Connector 0.138\" (3.50mm) Through Hole Tin", Current Rating=-, Insulation Color=Black, Manufacturer 1="Molex, LLC", Manufacturer Part Number 1=1722871104, Material Flammability Rating="UL94 V-0", Operating Temperature="-40°C ~ 105°C", Supplier Part Number 1=WM11703-ND, Voltage=400V, ComponentLink1Description=http://www.molex.com/pdm_docs/sd/1722871104_sd.pdf, ComponentLink1URL=http://www.molex.com/pdm_docs/sd/1722871104_sd.pdf, Connector Type=Header, Contact Finish - Mating=Tin, Contact Finish - Post=Tin, Contact Finish Thickness - Mating="60µin (1.52µm)", Contact Finish Thickness - Post="60µin (1.52µm)", Contact Length - Mating=-, Contact Length - Post="0.126\" (3.20mm)", Contact Material="Copper Alloy", Contact Shape=Square, Contact Type="Male Pin", Fastening Type="Latch Holder", Ingress Protection=-, Insulation Height="0.465\" (11.80mm)", Insulation Material="Liquid Crystal Polymer (LCP)", Mated Stacking Heights=26.99mm, Mounting Type="Through Hole", Number of Positions=4, Number of Positions Loaded=All, Number of Rows=1, Overall Contact Length=-, Packaging=Tray, Part Status=Active, Pitch - Mating="0.138\" (3.50mm)", Row Spacing - Mating=-, Series=UltraFit, Shrouding="Shrouded - 4 Wall", Style="Board to Cable/Wire", Supplier 1=Digi-Key, Termination=Solder
Q1 Q2: library part "MOSFET P-CH 500V 10A 300W TO-263", "P-Channel 500V 10A (Tc) 300W (Tc) Surface Mount TO-263 (IXTA)", Case/Package=TO-263, Continuous Drain Current (ID)=10A, Drain to Source Breakdown Voltage=-500V, Drain to Source Resistance=1R, Drain to Source Voltage (Vdss)=500V, Gate to Source Voltage (Vgs)=20V, Input Capacitance=2.84nF, Manufacturer=IXYS, Max Operating Temperature=150°C, Max Power Dissipation=300W, Min Operating Temperature=-55°C, Package Quantity=50, Supplier Part Number 1=IXTA10P50P-ND, ComponentLink1Description=https://datasheet.ciiva.com/15203/getdatasheetpartid-371166-15203275.pdf, ComponentLink1URL=https://datasheet.ciiva.com/15203/getdatasheetpartid-371166-15203275.pdf, Element Configuration=Single, Fall Time=44ns, Lead Free="Lead Free", Manufacturer Part Number=IXTA10P50P, Mount="Surface Mount", Number of Elements=1, On-State Resistance=1R, Packaging=Rail/Tube, Power Dissipation=300W, Pricing 1="1=5.96, 10=5.319, 100=4.3614, 500=3.53166, 1000=2.9785 (USD)", Radiation Hardening=No, Rds On Max=1R, Rise Time=28ns, Stock 1=2142, Supplier 1=Digi-Key, Turn-Off Delay Time=52ns
Q3: "N-Channel 650V 8A (Tc) 150W (Tc) Surface Mount TO-263", Case/Package=TO-263-3, Continuous Drain Current (ID)=8A, Drain to Source Voltage (Vdss)=650V, Input Capacitance=800pF, Manufacturer=IXYS, Manufacturer Part Number=IXTA8N65X2, Max Operating Temperature=150°C, Max Power Dissipation=150W, Min Operating Temperature=-55°C, Supplier Part Number 1=IXTA8N65X2-ND, ComponentLink1Description=http://www.mouser.com/ds/2/205/DS100649B(IXTY-TA-TP8N65X2)-1132259.pdf, ComponentLink1URL=http://www.mouser.com/ds/2/205/DS100649B(IXTY-TA-TP8N65X2)-1132259.pdf, ComponentLink2Description=http://ixapps.ixys.com/DataSheet/DS100649B(IXTY-TA-TP8N65X2).pdf, ComponentLink2URL=http://ixapps.ixys.com/DataSheet/DS100649B(IXTY-TA-TP8N65X2).pdf, Mount="Surface Mount", Packaging=Rail/Tube, Pricing 1="1=2.85, 10=2.576, 100=2.07, 500=1.61, 1000=1.334 (USD)", Rds On Max=500mR, Stock 1=69, Supplier 1=Digi-Key
Q4: "N-Channel 500V 6A (Tc) 300W (Tc) Through Hole TO-247 (IXTH)", Case/Package=TO-247-3, Continuous Drain Current (ID)=6A, Drain to Source Voltage (Vdss)=500V, Input Capacitance=2.8nF, Manufacturer=IXYS, Manufacturer Part Number=IXTH6N50D2, Max Power Dissipation=300W, Package Quantity=30, Supplier Part Number 1=IXTH6N50D2-ND, ComponentLink1Description=https://datasheet.ciiva.com/949/ds100177bixta-tp-th6n50d2-949628.pdf, ComponentLink1URL=https://datasheet.ciiva.com/949/ds100177bixta-tp-th6n50d2-949628.pdf, ComponentLink2Description=https://datasheet.ciiva.com/26790/ixth6n50d2-26790808.pdf, ComponentLink2URL=https://datasheet.ciiva.com/26790/ixth6n50d2-26790808.pdf, Mount="Through Hole", Packaging=Rail/Tube, Pricing 1="1=7.25, 10=6.521, 100=5.3613, 500=4.4919, 1000=3.9123 (USD)", Rds On Max=500mR, Stock 1=79, Supplier 1=Digi-Key
Q5: library part "MOSFET P-CH 60V 3A SOT223", "P-Channel 60V 3A (Ta) 2W (Ta) Surface Mount SOT-223", Case/Package=TO-261-4, Continuous Drain Current (ID)=3A, Drain to Source Breakdown Voltage=-60V, Drain to Source Resistance=190mR, Drain to Source Voltage (Vdss)=60V, Gate to Source Voltage (Vgs)=20V, Input Capacitance=637pF, Manufacturer=Diodes, Manufacturer Part Number=ZXMP6A17GQTA, Max Operating Temperature=150°C, Max Power Dissipation=2W, Min Operating Temperature=-55°C, Package Quantity=1, Supplier Part Number 1=ZXMP6A17GQTADIDKR-ND, ComponentLink1Description=https://datasheet.ciiva.com/29747/zxmp6a17gq-29747441.pdf, ComponentLink1URL=https://datasheet.ciiva.com/29747/zxmp6a17gq-29747441.pdf, ComponentLink2Description=https://datasheet.ciiva.com/29747/zxmp6a17gq-29747434.pdf, ComponentLink2URL=https://datasheet.ciiva.com/29747/zxmp6a17gq-29747434.pdf, ComponentLink3Description=https://datasheet.ciiva.com/29747/zxmp6a17gq-29747438.pdf, ComponentLink3URL=https://datasheet.ciiva.com/29747/zxmp6a17gq-29747438.pdf, Element Configuration=Single, Fall Time=11.3ns, Lead Free="Lead Free", Mount="Surface Mount", Number of Channels=1, Number of Pins=3, Packaging="Tape and Reel", Pricing 1="1=0.9, 10=0.788, 100=0.6076, 500=0.45012 (USD)", Radiation Hardening=No, Rds On Max=125mR, REACH SVHC="No SVHC", Rise Time=3.4ns, Stock 1=815, Supplier 1=Digi-Key, Turn-Off Delay Time=26.2ns, Turn-On Delay Time=2.6ns, Weight=0.000282oz
Q6: library part "MOSFET N-CH 55V 7A SOT223", "N-Channel 55V 7A (Tc) 8W (Tc) Surface Mount SOT-223", Manufacturer=Nexperia, Manufacturer Part Number=BUK7880-55A/CUX, Supplier Part Number 1=1727-2222-1-ND, ComponentLink1Description=https://assets.nexperia.com/documents/data-sheet/BUK7880-55A.pdf, ComponentLink1URL=https://assets.nexperia.com/documents/data-sheet/BUK7880-55A.pdf, Stock 1=0, Supplier 1=Digi-Key
Q7 Q9: "P-Channel 30V 4A (Ta) 1.6W (Ta) Surface Mount SOT-23-6", Current - Continuous Drain (Id) @ 25°C="4A (Ta)", Drain to Source Voltage (Vdss)=30V, Drive Voltage (Max Rds On,  Min Rds On)="4.5V, 10V", Input Capacitance (Ciss) (Max) @ Vds="639pF @ 25V", Manufacturer 1=STMicroelectronics, Manufacturer Part Number 1=STT4P3LLH6, Operating Temperature="150°C (TJ)", Package / Case=SOT-23-6, Power Dissipation (Max)="1.6W (Ta)", Supplier Part Number 1=497-15521-1-ND, ComponentLink1Description=http://www.st.com/content/ccc/resource/technical/document/datasheet/13/e4/a1/65/8b/79/44/73/DM00084060.pdf/files/DM00084060.pdf/jcr:content/translations/en.DM00084060.pdf, ComponentLink1URL=http://www.st.com/content/ccc/resource/technical/document/datasheet/13/e4/a1/65/8b/79/44/73/DM00084060.pdf/files/DM00084060.pdf/jcr:content/translations/en.DM00084060.pdf, FET Feature=-, FET Type=P-Channel, Gate Charge (Qg) (Max) @ Vgs="6nC @ 4.5V", Mounting Type="Surface Mount", Packaging="Cut Tape (CT)", Part Status=Active, Rds On (Max) @ Id, Vgs="56 mOhm @ 2A, 10V", Supplier 1=Digi-Key, Supplier Device Package=SOT-23-6, Technology="MOSFET (Metal Oxide)", Vgs (Max)=±20V, Vgs(th) (Max) @ Id="2.5V @ 250µA"
Q8 Q10: "N-Channel 60V 310mA (Ta) 370mW (Ta) Surface Mount SOT-23", Case/Package=TO-236-3, Continuous Drain Current (ID)=1.6A, Drain to Source Breakdown Voltage=60V, Drain to Source Resistance=140mR, Gate to Source Voltage (Vgs)=20V, Input Capacitance=315pF, Manufacturer=Diodes, Manufacturer Part Number=DMN6140L-7, Max Operating Temperature=150°C, Max Power Dissipation=700mW, Min Operating Temperature=-55°C, Package Quantity=3000, Power Dissipation=540mW, Supplier Part Number 1=DMN65D8L-7DICT-ND, Threshold Voltage=3V, ComponentLink1Description=https://datasheet.ciiva.com/29747/dmn6140l-29747654.pdf, ComponentLink1URL=https://datasheet.ciiva.com/29747/dmn6140l-29747654.pdf, ComponentLink2Description=https://datasheet.ciiva.com/29747/dmn6140l-29747660.pdf, ComponentLink2URL=https://datasheet.ciiva.com/29747/dmn6140l-29747660.pdf, ComponentLink3Description=https://datasheet.ciiva.com/6371/dmn65d8l-6371124.pdf, ComponentLink3URL=https://datasheet.ciiva.com/6371/dmn65d8l-6371124.pdf, ComponentLink4Description=https://datasheet.ciiva.com/6371/dmn65d8l-6371126.pdf, ComponentLink4URL=https://datasheet.ciiva.com/6371/dmn65d8l-6371126.pdf, ComponentLink5Description=https://datasheet.ciiva.com/13058/dmn65d8l-219098-13058455.pdf, ComponentLink5URL=https://datasheet.ciiva.com/13058/dmn65d8l-219098-13058455.pdf, ComponentLink6Description=https://datasheet.ciiva.com/6371/dmn65d8l-6371128.pdf, ComponentLink6URL=https://datasheet.ciiva.com/6371/dmn65d8l-6371128.pdf, Drain to Source Voltage (Vdss)=60V, Element Configuration=Single, Fall Time=2.7ns, FET Type="1 N-Channel", Height=1.1mm, Lead Free="Lead Free", Length=3mm, Mount="Surface Mount", Number of Channels=1, Number of Elements=1, Number of Pins=3, Packaging="Tape and Reel", Rds On Max=140mR, REACH SVHC="No SVHC", Rise Time=3.6ns, Stock 1=0, Supplier 1=Digi-Key, Turn-Off Delay Time=16.3ns, Turn-On Delay Time=2.6ns, Weight=0.000282oz, Width=1.4mm
R1 R2 R3 R4: "18 Ohms ±5% 100W Through Hole Resistor TO-247-2 Moisture Resistant, Non-Inductive Thick Film", Case/Package=TO-247-2, Manufacturer=Ohmite, Manufacturer Part Number=AP10118RJ, Max Operating Temperature=175°C, Max Power Dissipation=100W, Min Operating Temperature=-65°C, Resistance=18R, Supplier Part Number 1="AP101 18R J-ND", Temperature Coefficient=100ppm/°C, Tolerance=5%, Voltage Rating=700V, ComponentLink1Description=http://www.farnell.com/datasheets/2015590.pdf, ComponentLink1URL=http://www.farnell.com/datasheets/2015590.pdf, ComponentLink2Description=http://www.mouser.com/ds/2/303/acl_ap101-773331.pdf, ComponentLink2URL=http://www.mouser.com/ds/2/303/acl_ap101-773331.pdf, ComponentLink3Description=http://www.ohmite.com/cat/acl_ap101.pdf, ComponentLink3URL=http://www.ohmite.com/cat/acl_ap101.pdf, Composition="Thick Film", Height=0.825inch, Length=0.62inch, Number of Terminations=2, Packaging=Tray, Power Rating=100W, REACH SVHC=Unknown, Stock 1=0, Supplier 1=Digi-Key, Voltage Rating (DC)=700V, Width=0.195inch
R5 R6 R8: library part "RES SMD 470K OHM 0.1% 1/4W 1206", "470 kOhms ±0.1% 0.25W, 1/4W Chip Resistor 1206 (3216 Metric) Anti-Sulfur, Automotive AEC-Q200 Thin Film", Case/Package=1206, Case Code (Metric)=3216, Manufacturer=Susumu, Manufacturer Part Number=RG3216P-4703-B-T1, Max Operating Temperature=155°C, Max Power Dissipation=250mW, Min Operating Temperature=-55°C, Package Quantity=1, Power Rating=125mW, Resistance=470kR, Supplier Part Number 1=RG32P470KBDKR-ND, Temperature Coefficient=25ppm/°C, Tolerance=0.1%, Voltage Rating=150V, Voltage Rating (DC)=200V, Case Code (Imperial)=1206, ComponentLink1Description=https://datasheet.ciiva.com/2490/rg-rm-rgh-datasheet-2490488.pdf, ComponentLink1URL=https://datasheet.ciiva.com/2490/rg-rm-rgh-datasheet-2490488.pdf, ComponentLink2Description=https://datasheet.ciiva.com/2490/rg-rm-rgh-datasheet-2490489.pdf, ComponentLink2URL=https://datasheet.ciiva.com/2490/rg-rm-rgh-datasheet-2490489.pdf, ComponentLink3Description=https://datasheet.ciiva.com/2490/rg-rm-rgh-datasheet-2490490.pdf, ComponentLink3URL=https://datasheet.ciiva.com/2490/rg-rm-rgh-datasheet-2490490.pdf, ComponentLink4Description=https://datasheet.ciiva.com/12760/rg-rm-rgh-datasheet-12760397.pdf, ComponentLink4URL=https://datasheet.ciiva.com/12760/rg-rm-rgh-datasheet-12760397.pdf, Composition="Thin Film", Height=0.02inch, Lead Free="Lead Free", Length=0.126inch, Number of Pins=2, Number of Terminations=2, Packaging="Tape and Reel", Pricing 1="1=0.66, 10=0.474, 100=0.2462 (USD)", Stock 1=2986, Supplier 1=Digi-Key, Termination=SMD/SMT, Width=0.063inch
R7 R9: library part "RES SMD 29.4K OHM 1% 1/4W 1206", "29.4 kOhms ±1% 0.25W, 1/4W Chip Resistor 1206 (3216 Metric) Automotive AEC-Q200 Thick Film", Case/Package=1206, Case Code (Metric)=3216, Manufacturer=Panasonic, Manufacturer Part Number=ERJ-8ENF2942V, Max Operating Temperature=155°C, Max Power Dissipation=250mW, Min Operating Temperature=-55°C, Package Quantity=1, Resistance=29.4kR, Supplier Part Number 1=P29.4KFCT-ND, Temperature Coefficient=100ppm/°C, Tolerance=1%, Voltage Rating=200V, Case Code (Imperial)=1206, ComponentLink1Description=https://datasheet.ciiva.com/7861/426256-7861912.pdf, ComponentLink1URL=https://datasheet.ciiva.com/7861/426256-7861912.pdf, ComponentLink2Description=https://datasheet.ciiva.com/24126/aoa0000ce2-24126731.pdf, ComponentLink2URL=https://datasheet.ciiva.com/24126/aoa0000ce2-24126731.pdf, ComponentLink3Description=https://datasheet.ciiva.com/6159/426256-6159628.pdf, ComponentLink3URL=https://datasheet.ciiva.com/6159/426256-6159628.pdf, ComponentLink4Description=https://datasheet.ciiva.com/9191/aoa0000ce2-9191007.pdf, ComponentLink4URL=https://datasheet.ciiva.com/9191/aoa0000ce2-9191007.pdf, Composition="Thick Film", Contact Plating=Tin, Depth=1.6mm, Height=0.028inch, Length=3.2mm, Military Standard=Not, Mount="Surface Mount", Number of Terminations=2, Packaging="Tape and Reel", Power Rating=250mW, Pricing 1="1=0.11, 10=0.097, 100=0.0373, 1000=0.01641, 2500=0.01417 (USD)", REACH SVHC="No SVHC", Stock 1=24502, Supplier 1=Digi-Key, Termination=SMD/SMT, Voltage Rating (DC)=200V, Weight=0.000571oz, Width=0.063inch
R10: library part "RES SMD 33K OHM 0.1% 1/4W 1206", "33 kOhms ±0.1% 0.25W, 1/4W Chip Resistor 1206 (3216 Metric) Thin Film", Case/Package=1206, Case Code (Metric)=3216, Manufacturer=Yageo, Manufacturer Part Number=RT1206BRD0733KL, Max Operating Temperature=125°C, Max Power Dissipation=250mW, Min Operating Temperature=-55°C, Package Quantity=5000, Resistance=33kR, Supplier Part Number 1=YAG2038CT-ND, Temperature Coefficient=25ppm/°C, Tolerance=0.1%, Voltage Rating=200V, Case Code (Imperial)=1206, ComponentLink1Description=https://datasheet.ciiva.com/2587/pyu-rt-1-to-0-05-rohs-l-4-2587636.pdf, ComponentLink1URL=https://datasheet.ciiva.com/2587/pyu-rt-1-to-0-05-rohs-l-4-2587636.pdf, ComponentLink2Description=https://datasheet.ciiva.com/46634/pyu-rt-1-to-0-05-rohs-l-5-46634965.pdf, ComponentLink2URL=https://datasheet.ciiva.com/46634/pyu-rt-1-to-0-05-rohs-l-5-46634965.pdf, Composition="Thin Film", Contact Plating=Tin,Matte, Depth=1.6mm, Height=0.026inch, Lead Free="Lead Free", Length=0.122inch, Military Standard=Not, Number of Terminations=2, Packaging="Tape and Reel", Power Rating=250mW, Pricing 1="1=0.68, 10=0.523, 100=0.22, 1000=0.12137, 2500=0.11378 (USD)", Radiation Hardening=No, Stock 1=13446, Supplier 1=Digi-Key, Termination=SMD/SMT, Voltage Rating (DC)=200V, Width=0.063inch
R11: "2 kOhms ±0.1% 0.25W, 1/4W Chip Resistor 1206 (3216 Metric) Automotive AEC-Q200 Thin Film", Case/Package=1206, Case Code (Metric)=3216, Manufacturer=Panasonic, Manufacturer Part Number=ERA-8AEB202V, Max Operating Temperature=155°C, Max Power Dissipation=250mW, Min Operating Temperature=-55°C, Package Quantity=5000, Resistance=2kR, Supplier Part Number 1=P2.0KBCCT-ND, Temperature Coefficient=25ppm/°C, Tolerance=0.1%, Voltage Rating=150V, Case Code (Imperial)=1206, ComponentLink1Description=https://datasheet.ciiva.com/43458/391390-43458070.pdf, ComponentLink1URL=https://datasheet.ciiva.com/43458/391390-43458070.pdf, ComponentLink2Description=https://datasheet.ciiva.com/48529/era-eng-tds-48529591.pdf, ComponentLink2URL=https://datasheet.ciiva.com/48529/era-eng-tds-48529591.pdf, ComponentLink3Description=https://datasheet.ciiva.com/6082/391390-6082060.pdf, ComponentLink3URL=https://datasheet.ciiva.com/6082/391390-6082060.pdf, ComponentLink4Description=https://datasheet.ciiva.com/17214/aoa0000ce26-17214381.pdf, ComponentLink4URL=https://datasheet.ciiva.com/17214/aoa0000ce26-17214381.pdf, ComponentLink5Description=https://datasheet.ciiva.com/9197/aoa0000ce26-9197582.pdf, ComponentLink5URL=https://datasheet.ciiva.com/9197/aoa0000ce26-9197582.pdf, Composition="Metal Film,Thin Film", Contact Plating=Tin, Depth=1.6mm, Height=0.6mm, Lead Free="Lead Free", Length=3.2mm, Military Standard=Not, Mount="Surface Mount", Number of Pins=2, Number of Terminations=2, Packaging="Tape and Reel", Power Rating=250mW, Pricing 1="1=0.66, 10=0.474, 100=0.2465, 1000=0.13276, 2500=0.13095 (USD)", Radiation Hardening=No, REACH SVHC="No SVHC", Stock 1=43293, Supplier 1=Digi-Key, Termination=SMD/SMT, Voltage Rating (DC)=150V, Weight=0.000571oz, Width=0.063inch
R12: "0 Ohms Jumper 0.25W, 1/4W Chip Resistor 1206 (3216 Metric) Automotive AEC-Q200 Thick Film", Case/Package=1206, Case Code (Metric)=3216, Manufacturer=Vishay, Manufacturer Part Number=CRCW12060000Z0EA, Max Operating Temperature=155°C, Min Operating Temperature=-55°C, Package Quantity=5000, Power Rating=250mW, Resistance=0mR, Supplier Part Number 1=541-0.0ECT-ND, Temperature Coefficient=100ppm/°C, Tolerance=1%, Voltage Rating=200V, Case Code (Imperial)=1206, ComponentLink1Description=https://datasheet.ciiva.com/16720/70201119-16720117.pdf, ComponentLink1URL=https://datasheet.ciiva.com/16720/70201119-16720117.pdf, ComponentLink2Description=https://datasheet.ciiva.com/7841/1720486-7841862.pdf, ComponentLink2URL=https://datasheet.ciiva.com/7841/1720486-7841862.pdf, ComponentLink3Description=https://datasheet.ciiva.com/16364/dcrcwe3-16364998.pdf, ComponentLink3URL=https://datasheet.ciiva.com/16364/dcrcwe3-16364998.pdf, ComponentLink4Description=https://datasheet.ciiva.com/5549/dcrcwe3-109170-5549528.pdf, ComponentLink4URL=https://datasheet.ciiva.com/5549/dcrcwe3-109170-5549528.pdf, ComponentLink5Description=https://datasheet.ciiva.com/7841/1697337-7841706.pdf, ComponentLink5URL=https://datasheet.ciiva.com/7841/1697337-7841706.pdf, ComponentLink6Description=https://datasheet.ciiva.com/11809/0900766b80d98b5e-11809211.pdf, ComponentLink6URL=https://datasheet.ciiva.com/11809/0900766b80d98b5e-11809211.pdf, ComponentLink7Description=https://datasheet.ciiva.com/16782/70201119-16782555.pdf, ComponentLink7URL=https://datasheet.ciiva.com/16782/70201119-16782555.pdf, Composition="Thick Film", Contact Plating=Tin, Depth=1.6mm, Height=0.55mm, Lead Free="Lead Free", Length=3.2mm, Military Standard=Not, Mount="Surface Mount", Packaging="Tape and Reel", Pricing 1="1=0.1, 10=0.064, 25=0.046, 50=0.0352, 100=0.0259, 250=0.01976, 500=0.0158, 1000=0.01163 (USD)", Radiation Hardening=No, REACH SVHC=Unknown, Stock 1=0, Supplier 1=Digi-Key, Termination=SMD/SMT, Voltage Rating (DC)=200V, Weight=0.000353oz, Width=1.6mm
R13: "22.1 Ohm ±1% 0.1W, 1/10W Chip Resistor 0603 (1608 Metric) Moisture Resistant Thick Film", Manufacturer 1=Yageo, Manufacturer Part Number 1=RC0603FR-0722R1L, Operating Temperature="-55°C ~ 155°C", Package / Case="0603 (1608 Metric)", Power=1/10W, Resistance=22.1, Supplier Device Package=0603, Supplier Part Number 1=311-22.1HRCT-ND, Temperature Coefficient=±100ppm/°C, Tolerance=±1%, ComponentLink1Description=http://www.yageo.com/documents/recent/PYu-RC_Group_51_RoHS_L_7.pdf, ComponentLink1URL=http://www.yageo.com/documents/recent/PYu-RC_Group_51_RoHS_L_7.pdf, Composition="Thick Film", Failure Rate=-, Height - Seated (Max)="0.022\" (0.55mm)", Packaging="Cut Tape (CT)", Part Status=Active, Size / Dimension="0.063\" L x 0.031\" W (1.60mm x 0.80mm)", Supplier 1=Digi-Key
R14 R15: Case/Package=TO-247-2, Manufacturer=Ohmite, Manufacturer Part Number=AP101330RJ, Max Operating Temperature=175°C, Max Power Dissipation=100W, Min Operating Temperature=-65°C, Resistance=330R, Supplier Part Number 1="AP101 330R J-ND", Temperature Coefficient=100ppm/°C, Tolerance=5%, Voltage Rating=700V, ComponentLink1Description=http://www.mouser.com/ds/2/303/acl_ap101-773331.pdf, ComponentLink1URL=http://www.mouser.com/ds/2/303/acl_ap101-773331.pdf, ComponentLink2Description=http://www.farnell.com/datasheets/2015590.pdf, ComponentLink2URL=http://www.farnell.com/datasheets/2015590.pdf, ComponentLink3Description=http://www.ohmite.com/cat/acl_ap101.pdf, ComponentLink3URL=http://www.ohmite.com/cat/acl_ap101.pdf, Composition="Thick Film", Height=0.825inch, Length=0.62inch, Number of Terminations=2, Packaging=Tray, Power Rating=100W, Stock 1=0, Supplier 1=Digi-Key, Voltage Rating (DC)=700V, Width=0.195inch
R16 R18 R19 R20 R21 R24 R26 R27 R28 R29 R30 R32: "RES SMD 10K OHM 1% 1/10W 0603", Manufacturer 1=Yageo, Manufacturer Part Number 1=RC0603FR-0710KL, Operating Temperature="-55°C ~ 155°C", Package / Case="0603 (1608 Metric)", Power=1/10W, Resistance=10k, Supplier Device Package=0603, Supplier Part Number 1=311-10.0KHRCT-ND, Temperature Coefficient=±100ppm/°C, Tolerance=±1%, ComponentLink1Description=http://www.yageo.com/documents/recent/PYu-RC_Group_51_RoHS_L_7.pdf, ComponentLink1URL=http://www.yageo.com/documents/recent/PYu-RC_Group_51_RoHS_L_7.pdf, Composition="Thick Film", Failure Rate=-, Height - Seated (Max)="0.022\" (0.55mm)", Packaging="Cut Tape (CT)", Part Status=Active, Size / Dimension="0.063\" L x 0.031\" W (1.60mm x 0.80mm)", Supplier 1=Digi-Key